# Altium PCB OUTDATED - motordriver-v6.3.PcbDoc (part 1 of 2)
Units mil, origin at the board's own origin, x right, y up, seen from the top; angles counter-clockwise.
Board outline 1181.1 x 2362.2 mil, 4 copper layers (TOP, GND, POWER, BOT), stack 23.756 mil thick; 171 components, 78 nets, 481 pads, 238 vias.
Unrouted connection lines stored in the file: 109.
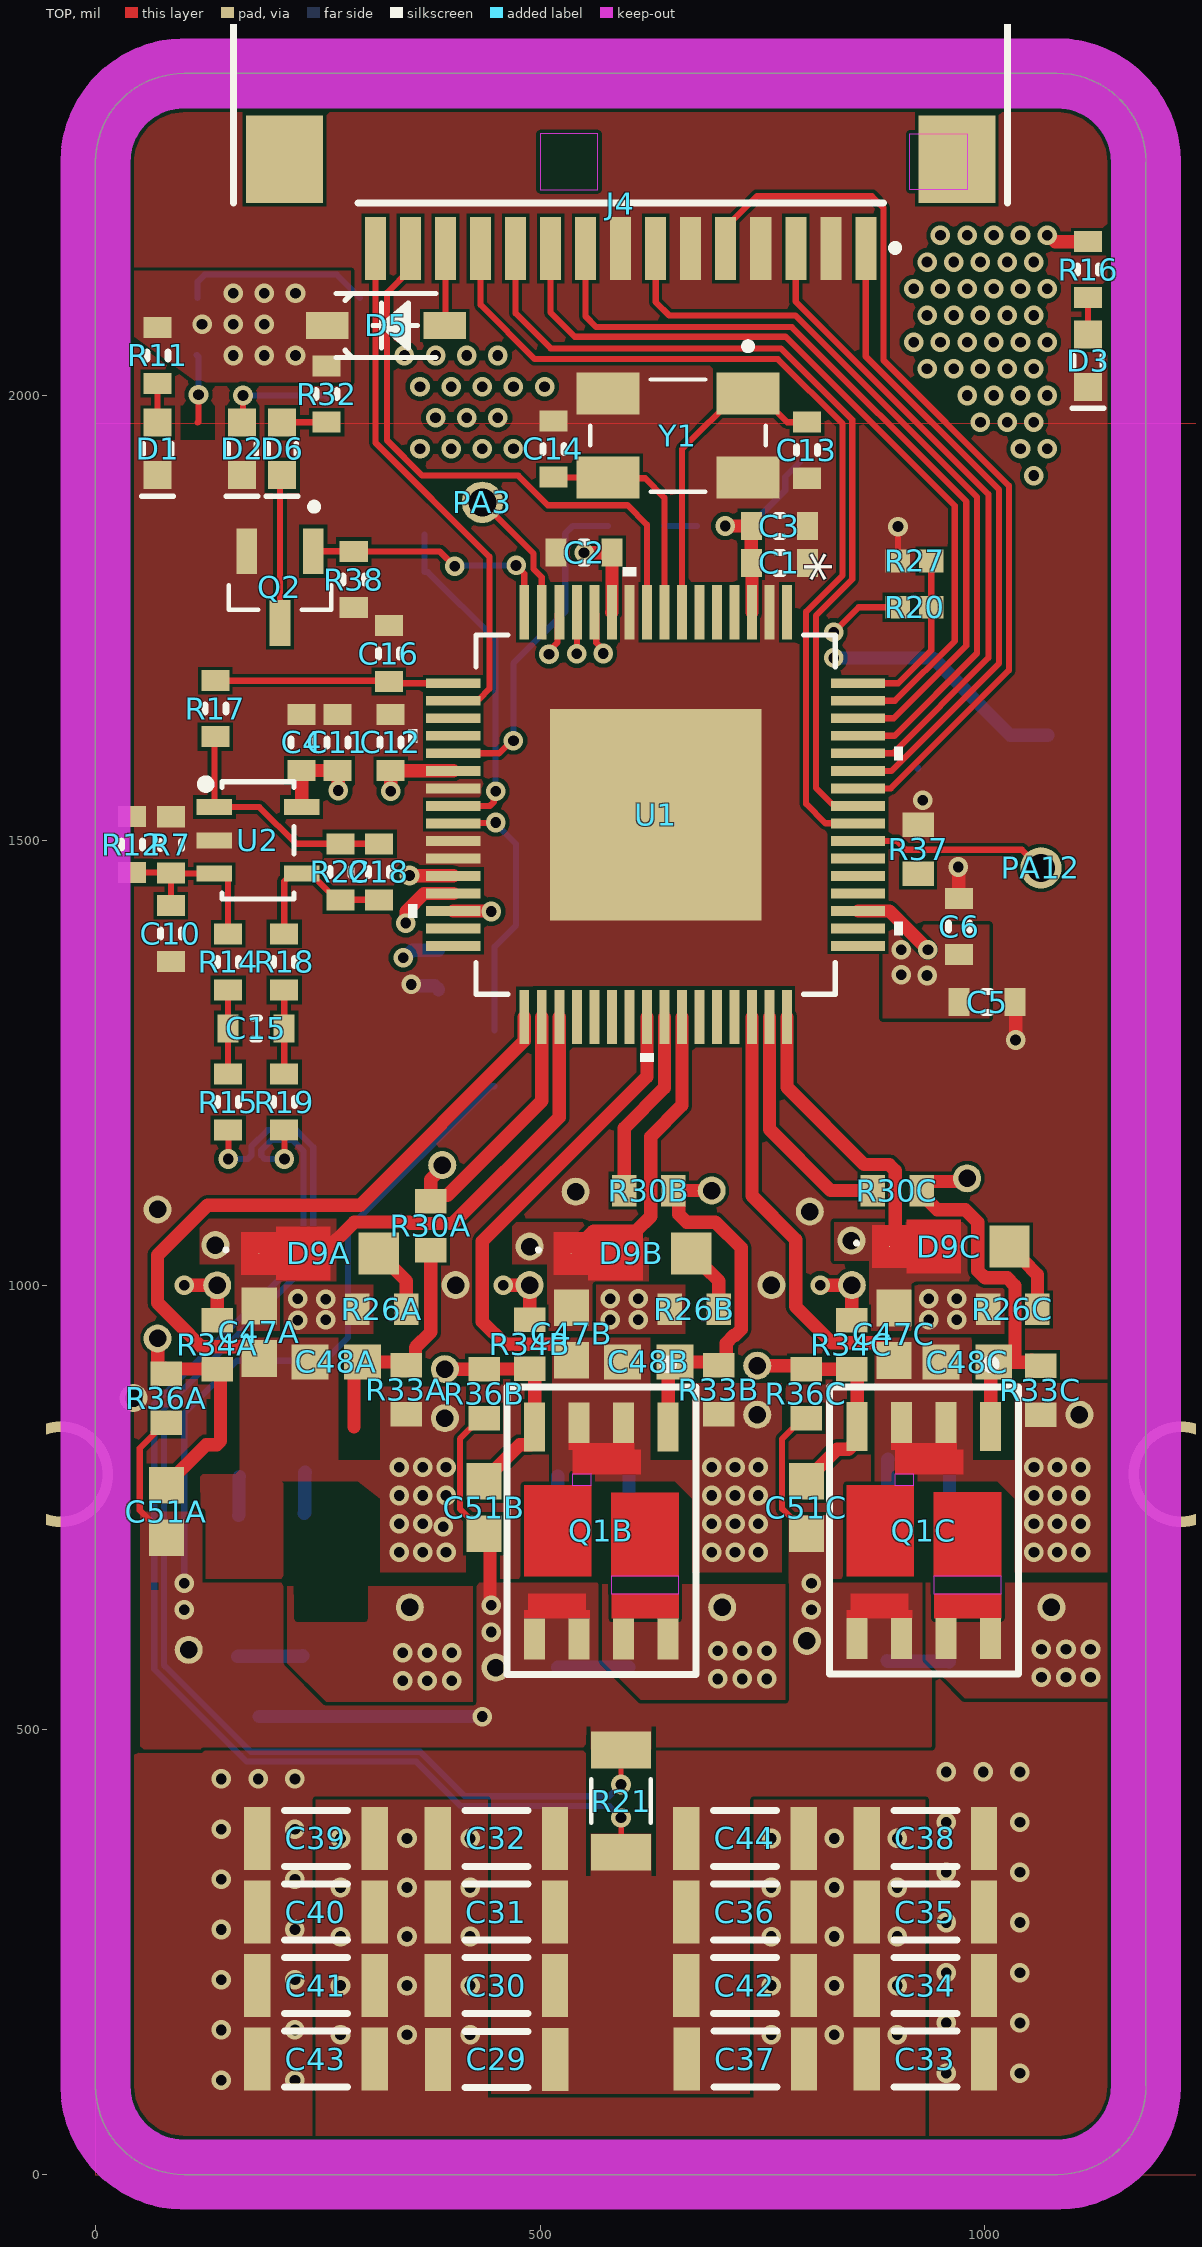
[diagram p0: TOP view]
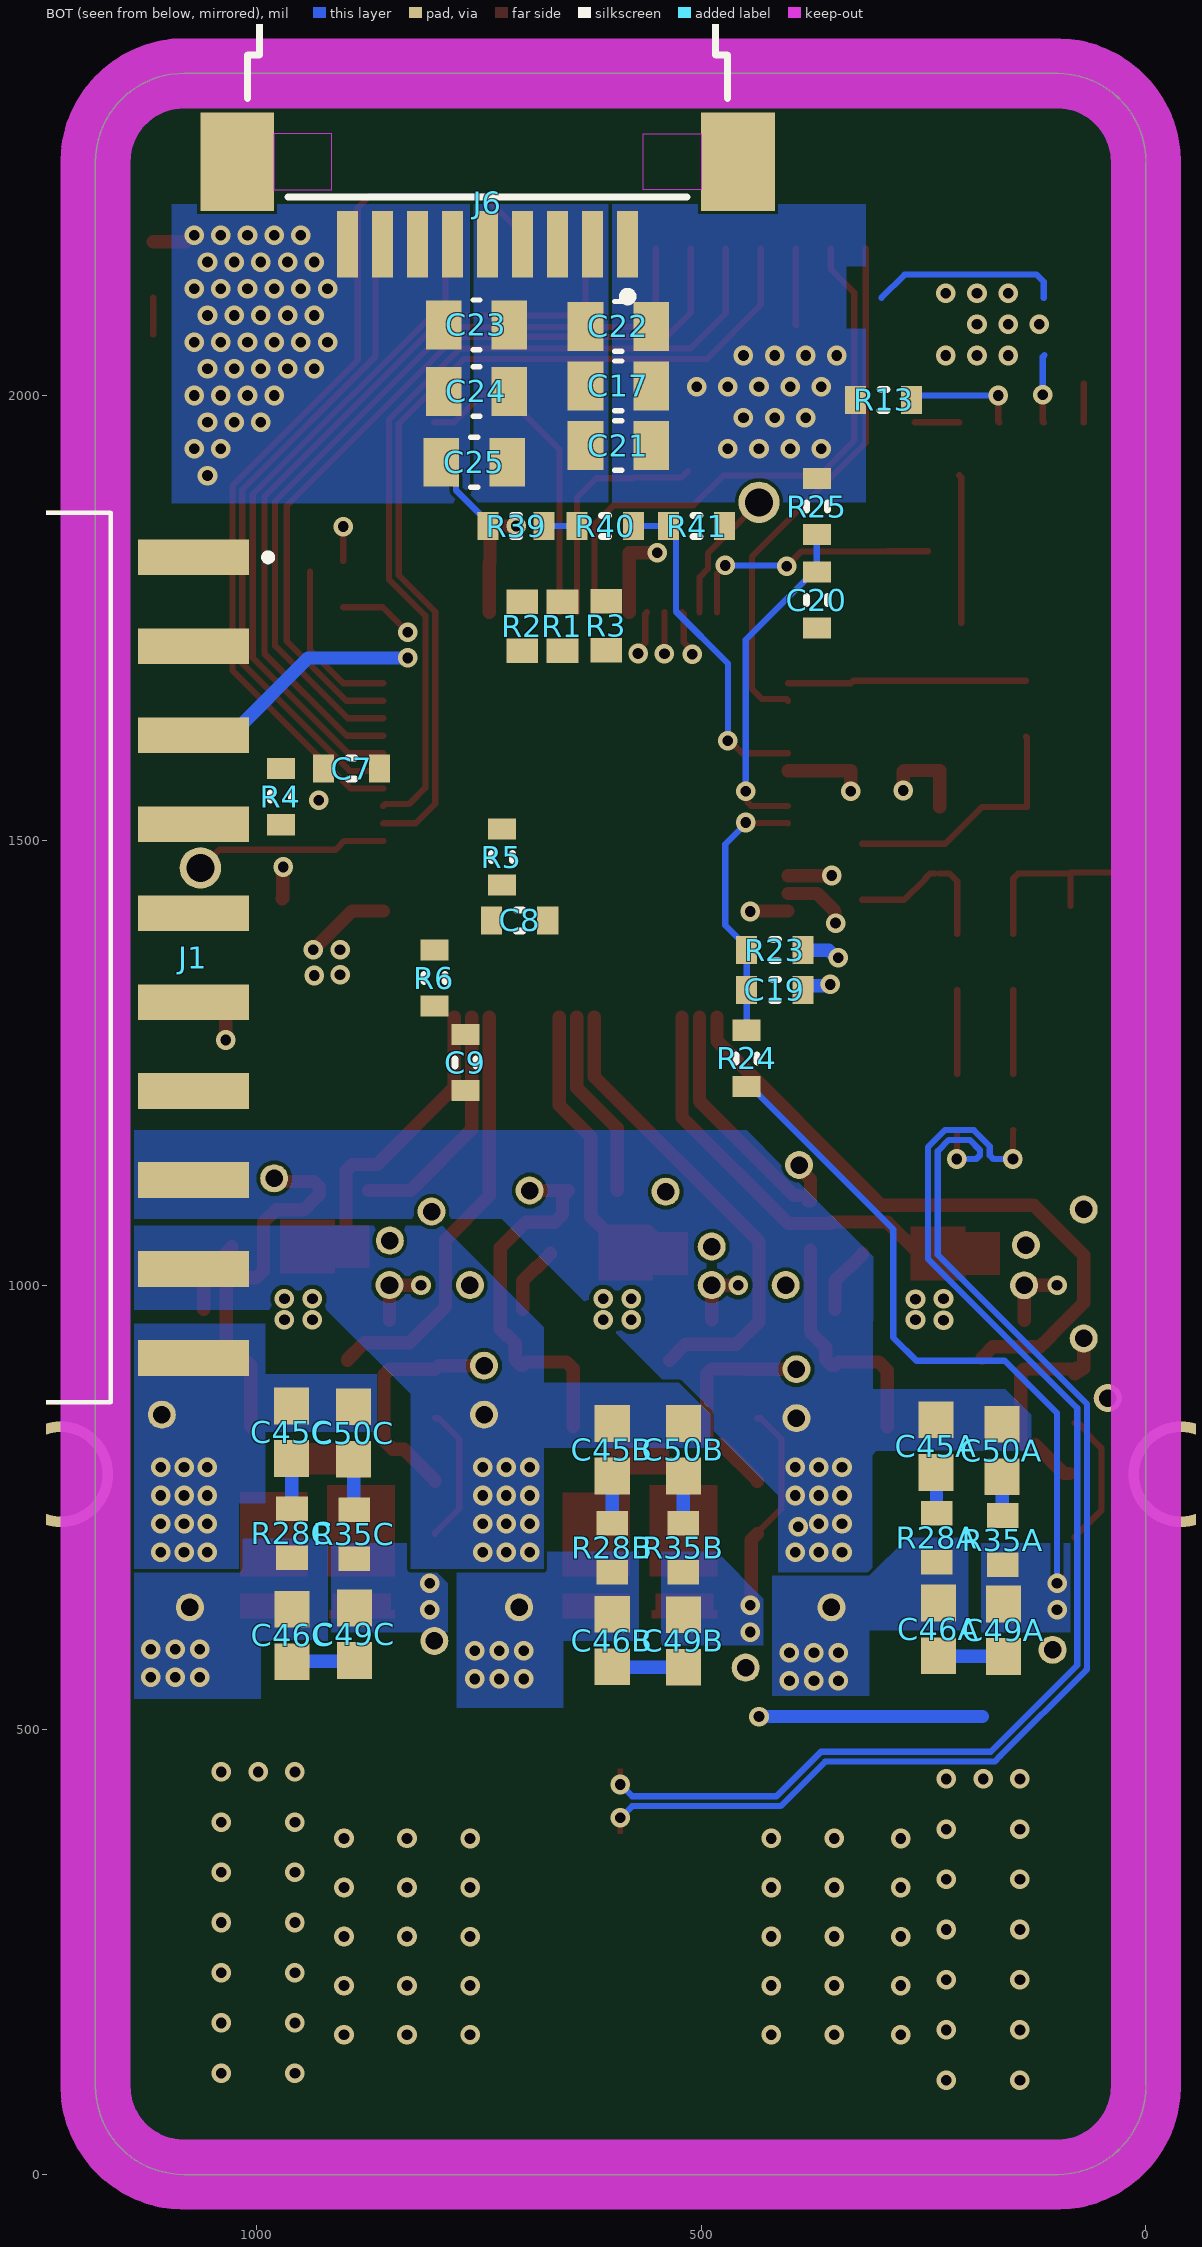
[diagram p1: BOT view, seen from below]
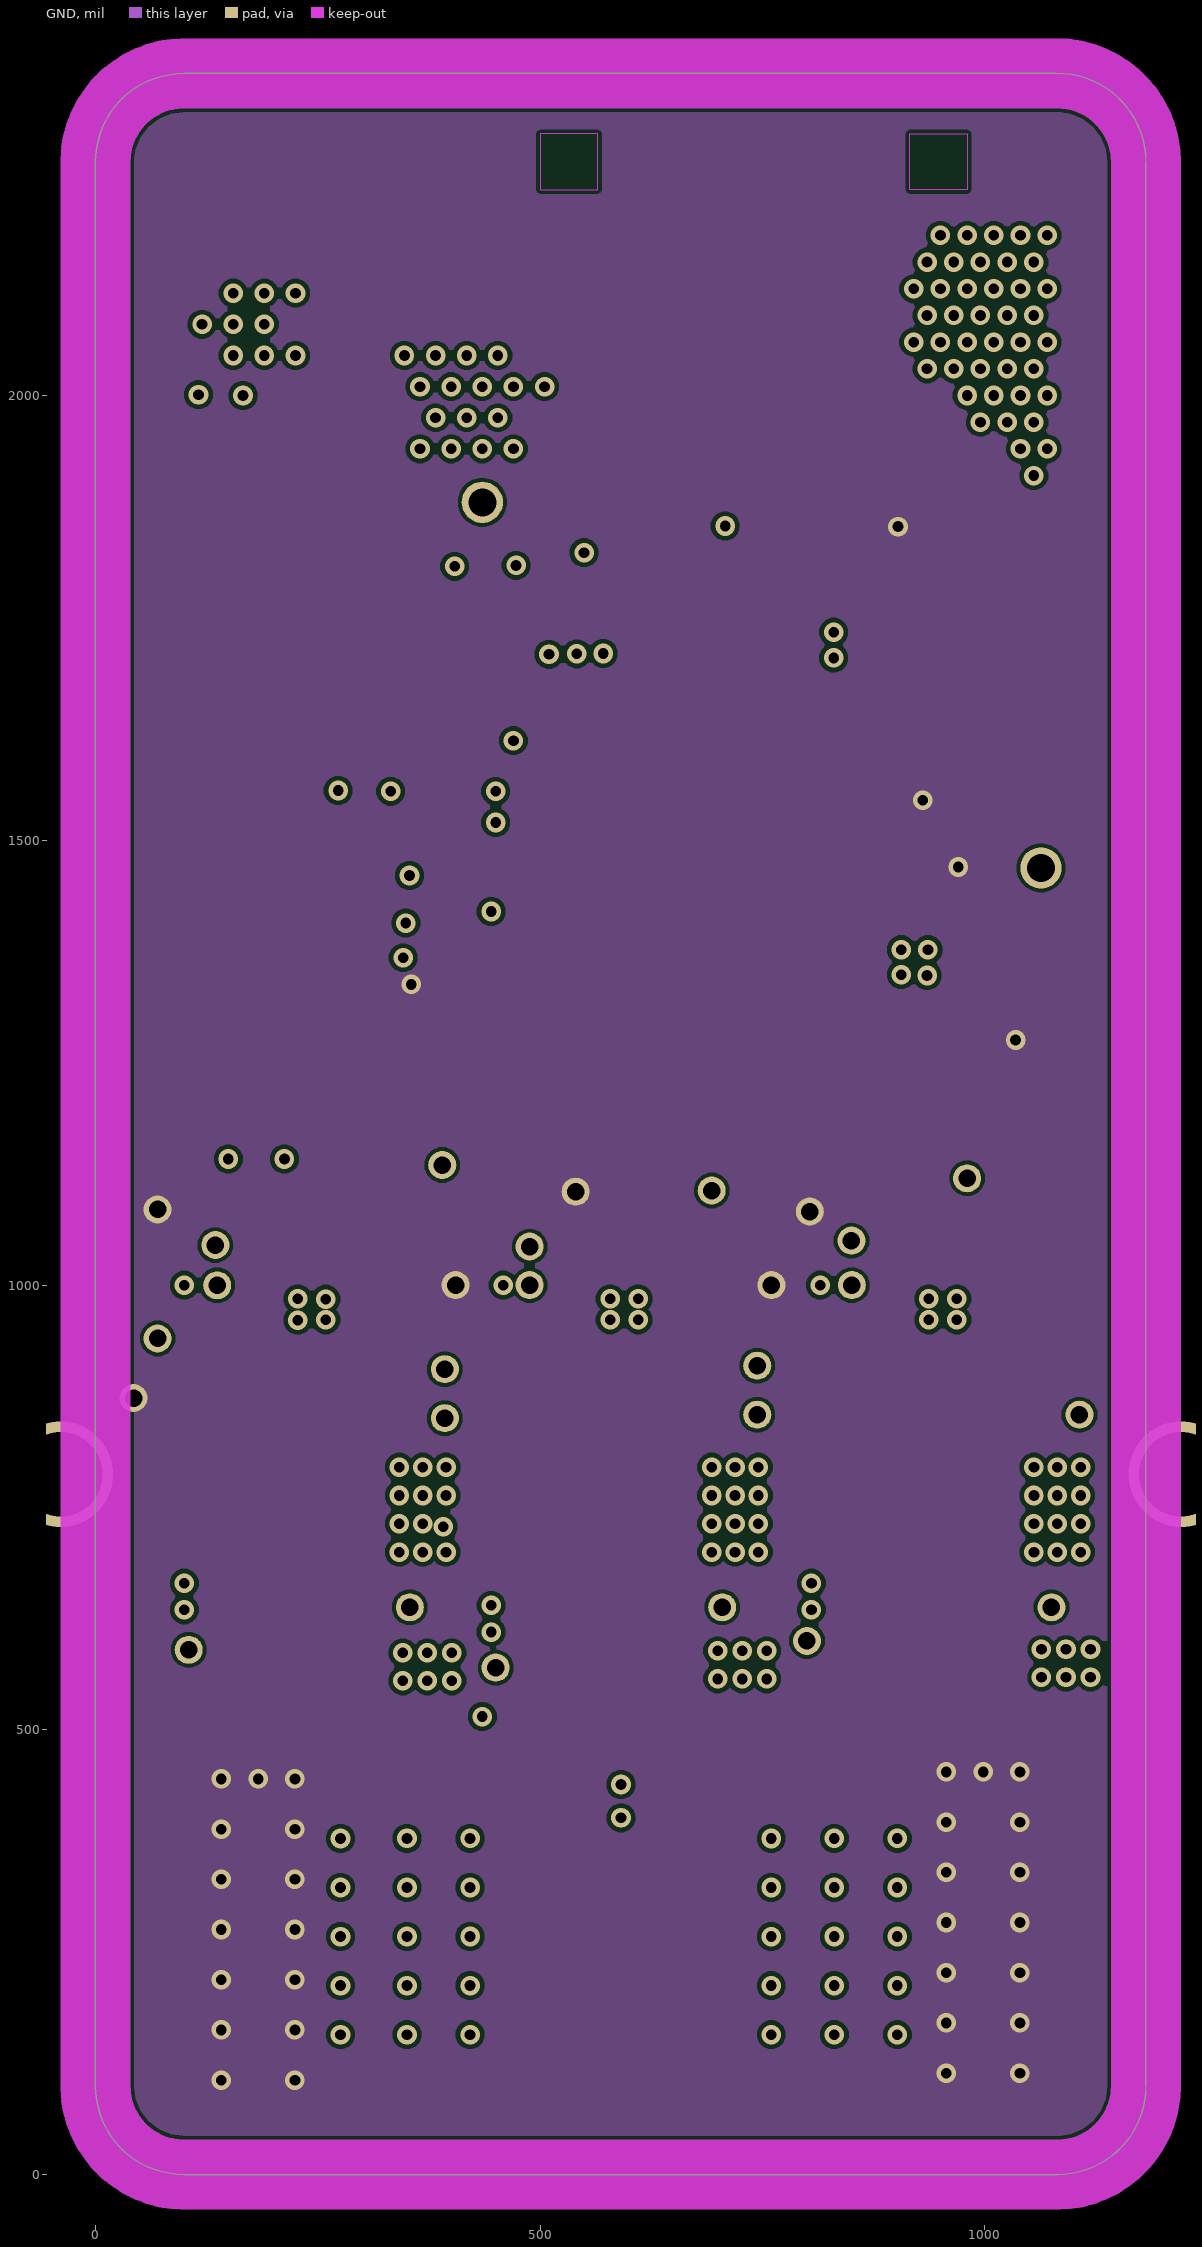
[diagram p2: GND]
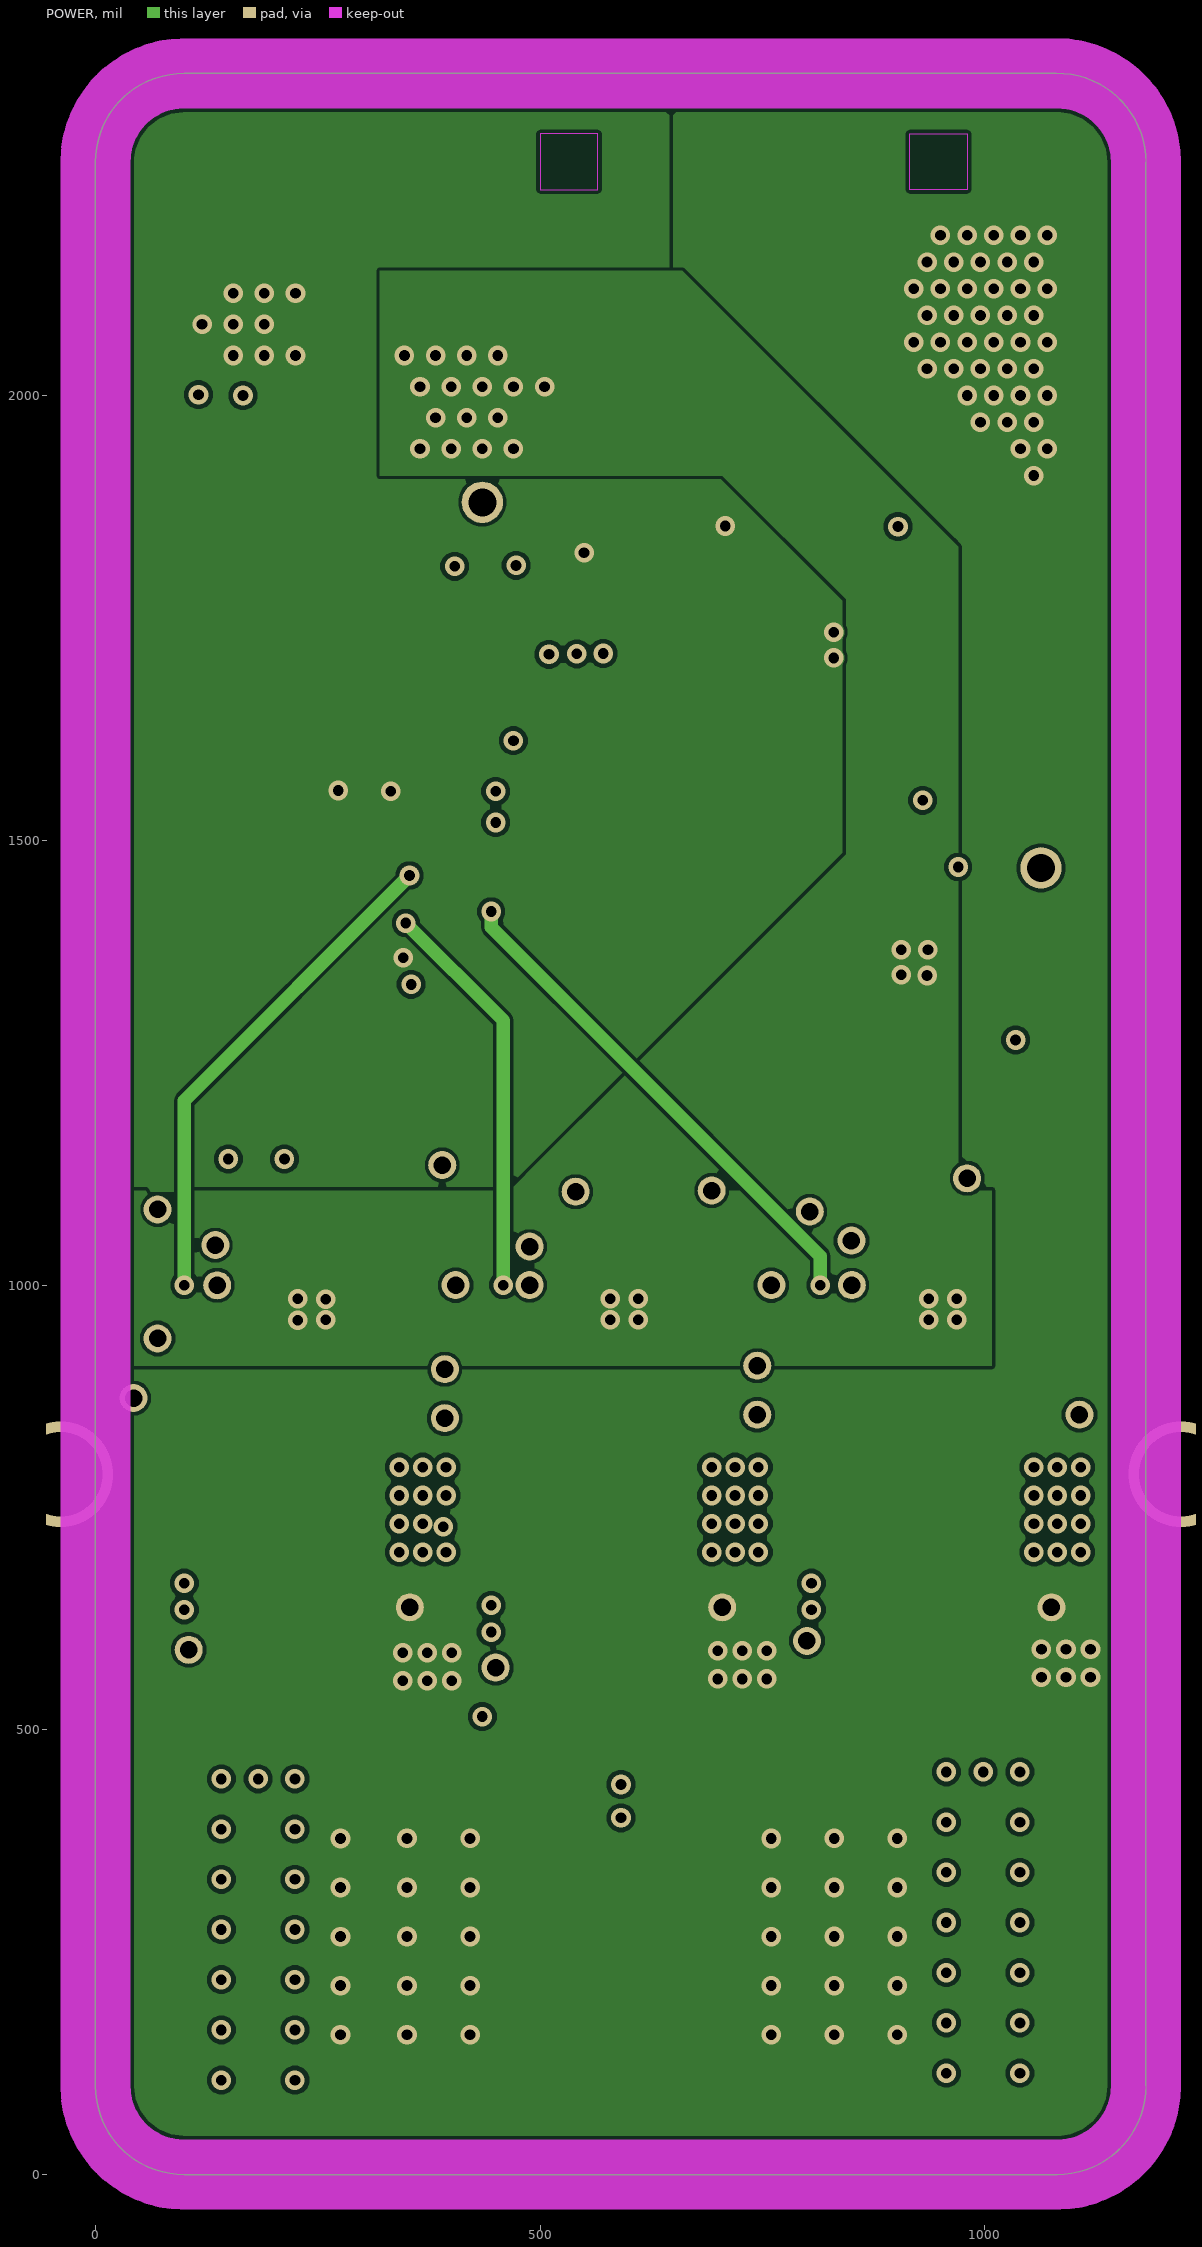
[diagram p3: POWER]

## Layer stack, top to bottom
Top Solder: solder mask 0.4, Solder Resist, Dk 3.5
TOP: signal copper 1.4
Dielectric 2: prepreg 2.8, PP-006, Dk 4.1
GND: signal copper 1.378
Dielectric 1: dielectric 12.6, FR-4, Dk 4.8
POWER: signal copper 1.378
Dielectric 3: prepreg 2.8, PP-006, Dk 4.1
BOT: signal copper 1.4
Bottom Solder: solder mask 0.4, Solder Resist, Dk 3.5

## Board outline
1181.1,2262.2 ccw(c1081.11,2262.21) 1080.33,2362.2 100,2362.2 ccw(c99.99,2262.21) 0,2262.2 0,100 ccw(c100,100) 100,0 1081.1,0 ccw(c1081.1,100) 1181.1,100 1181.1,2261.52 ccw(c1098.97,2262.11)

## Design rules (kind name [scope] priority, off if disabled: settings)
BoardOutlineClearance [All] p1: gap=7.87 ignorepadtopadclearanceinfootprint=FALSE
Clearance [All] p1: gap=4 ignorepadtopadclearanceinfootprint=FALSE except(5: Arc-Via Track-Via SMDPad-Via THPad-Via Via-Via Via-Fill Via-Poly Via-Region Via-Text; 9.84: Arc-Hole Track-Hole SMDPad-Hole THPad-Hole Via-Hole Fill-Hole Poly-Hole Region-Hole Text-Hole)
ComponentClearance [All] p1: gap=4 collisioncheckmode=3 verticalgap=4 showdistances=TRUE
DiffPairsRouting [All] p1: maxlimit=4 minlimit=4 mostfreqgap=4 toplayer_minwidth=4 toplayer_maxwidth=71497.94 toplayer_prefwidth=4 midlayer1_minwidth=4 midlayer1_maxwidth=71497.94 midlayer1_prefwidth=4 midlayer2_minwidth=4 midlayer2_maxwidth=71497.94 midlayer2_prefwidth=4 bottomlayer_minwidth=4 bottomlayer_maxwidth=71497.94 bottomlayer_prefwidth=4 maxuncoupledlength=500
Height [All] p1: minheight=0 maxheight=71497.94 prefheight=500
HoleSize [All] p1: absolutevalues=TRUE maxlimit=248.03 minlimit=7.87 maxpercent=80.000 minpercent=20.000
HoleToHoleClearance [All] p1: gap=9.84 allowstackedmicrovias=FALSE
MinimumAnnularRing [All] p1: minimumring=3
MinimumSolderMaskSliver [All] p1: minsoldermaskwidth=0
PlaneClearance [All] p1: clearance=4
PlaneConnect PlaneConnectPowerPads [InPadClass('PowerPads')] p1: planeconnectstyle=Direct reliefexpansion=20 reliefentries=4 reliefconductorwidth=10 reliefairgap=10
PlaneConnect [All] p2: pad.planeconnectstyle=Relief pad.reliefexpansion=11.81 pad.reliefentries=4 pad.reliefconductorwidth=4 pad.reliefairgap=4 via.planeconnectstyle=Direct via.reliefexpansion=11.81 via.reliefentries=4 via.reliefconductorwidth=5 via.reliefairgap=5
PolygonConnect PolygonConnectPowerPads [All vs (InPadClass('PowerPads'))] p1: connectstyle=Direct reliefconductorwidth=10 reliefentries=4 polygonreliefangle="90 Angle" airgapwidth=10
PolygonConnect [All] p2: connectstyle=Direct reliefconductorwidth=4 reliefentries=4 polygonreliefangle="90 Angle" airgapwidth=4
RoutingVias [All] p1: holewidth=7.87 width=17.72 viastyle="Through Hole" minholewidth=7.87 minwidth=17.72 maxholewidth=248.03 maxwidth=257.87 useviatemplates=TRUE viatemplateguid#1={32CECE7D-AA01-4692-BDA7-45C10FF4C971} viatemplatename#1=v56h30m0mx0
SilkToSilkClearance [All] p1: silktosilkclearance=0
SilkToSolderMaskClearance [IsPad] p1: minsilkscreentomaskgap=4 clearancetoexposedcopper=TRUE
SolderMaskExpansion [All] p1: expansion=2.95 istentingtop=FALSE
SupplyNets "Schematic Supply Nets_2" [InNet('Vdd')] p1: voltage=0.000
SupplyNets "Schematic Supply Nets_4" [InNet('GND')] p2: voltage=0.000
SupplyNets "Schematic Supply Nets_3" [InNet('VDD_UI')] p3: voltage=0.000
SupplyNets "Schematic Supply Nets_1" [InNet('VCC')] p4: voltage=0.000
SupplyNets "Schematic Supply Nets" [InNet('HV')] p5: voltage=0.000
Width [All] p1: maxlimit=71497.94 minlimit=4 preferedwidth=7
20 further rules are at their usual default settings.

## Classes and differential pairs
channel class inverter: Inverter1 Inverter2 Inverter3
component class STSPIN: C1 C2 C3 C4 C5 C6 C7 C8 C9 C10 C11 C12 C13 C14 C15 C16 C18 C19 C20 C29 C30 C31 C32 C33 C34 C35 C36 C37 C38 C39 C40 C41 C42 C43 C44 C_FB D1 D2 D3 D6 PA3 PA12 Q2 R1 R2 R3 R4 R5 R6 R7 R11 R12 R13 R14 R15 R16 R17 R18 R19 R20 R21 R22 R23 R24 R25 R27 R32 R37 R38 R39 R40 R41 S_N S_P TP1 TP2 TP3 TP4 TP5 TP6 TP7 TP8 TP9 TP11 TP12 U1 U2 Y1
component class "Power, Hall Sensor, Motor Connectors": C17 C21 C22 C23 C24 C25 D5 J1 J4 J6 J?
component class Inverter3: BOOTC C45C C46C C47C C48C C49C C50C C51C D9C HGC HVGC LGC LVGC OUT1C Q1C R26C R28C R30C R33C R34C R35C R36C SENSE1C TP10C
component class Inverter2: BOOTB C45B C46B C47B C48B C49B C50B C51B D9B HGB HVGB LGB LVGB OUT1B Q1B R26B R28B R30B R33B R34B R35B R36B SENSE1B TP10B
component class Inverter1: BOOTA C45A C46A C47A C48A C49A C50A C51A D9A HGA HVGA LGA LVGA OUT1A Q1A R26A R28A R30A R33A R34A R35A R36A SENSE1A TP10A
differential pair SENSE: +SENSE_P -SENSE_N
differential pair SENSE_F: +SENSE_F_P -SENSE_F_N

## Components (designator, comment, footprint, x,y, rotation, side; value= is the part's Value field where it differs from the comment)
BOOTA "RCT-0C" RCT-0C-Footprint-1 3488.19,1913.39 r90 top (schematic designator BOOT)
BOOTB "RCT-0C" RCT-0C-Footprint-1 3488.19,2228.35 r90 top (schematic designator BOOT)
BOOTC "RCT-0C" RCT-0C-Footprint-1 3488.19,2503.94 r90 top (schematic designator BOOT)
C1 "100nF" 0603 769,1812 r180 top
C2 "100nF" 0603 549.41,1823.36 r0 top
C3 "100nF" 0603 768.91,1853.31 r180 top
C4 "100nF" 0603 232,1610 r270 top
C5 "100nF" 0603 1002.5,1318.11 r180 top
C6 "2200pF" 0603 971,1403 r270 top
C7 "50pF 50V" 0603 892.94,1580.49 r0 bottom value=10nF
C8 "50pF 50V" 0603 704,1410 r0 bottom value=10nF
C9 "50pF 50V" 0603 765,1250 r90 bottom value=10nF
C10 "22pF" 0603 85,1395 r270 top
C11 "10uF" 0603 272,1610 r270 top
C12 "0.10uF" 0603 332,1610 r270 top
C13 "10pF" 0603 800,1938.5 r90 top locked
C14 "10pF" 0603 515,1940 r270 top locked
C15 "330pF" 0603 180.79,1288.48 r180 top
C16 "220pF" 0603 330,1710 r270 top
C17 "CAP 10uF 50V" 0805 593.07,2010.75 r180 bottom value=10µF
C18 "22pF" 0603 318.9,1464.57 r270 top
C19 "1nF 50V" 0603 417.32,1331.79 r0 bottom value=10nF
C20 "0.047uF" 0603 370,1770 r90 bottom
C21 "CAP 10uF 50V" 0805 593.07,1943.82 r180 bottom value=10µF
C22 "CAP 10uF 50V" 0805 593.07,2077.68 r180 bottom value=10µF
C23 "10uF" 0805 752.62,2079.33 r0 bottom
C24 "10uF" 0805 752.62,2004.53 r0 bottom
C25 "10uF" 0805 755,1925 r0 bottom
C29 "50V" "1206 IPC Class B" 451.18,129.53 r180 top value=10µF
C30 "50V" "1206 IPC Class B" 450.79,212.61 r180 top value=10µF
C31 "50V" "1206 IPC Class B" 450.79,295.28 r180 top value=10µF
C32 "50V" "1206 IPC Class B" 450.79,377.95 r180 top value=10µF
C33 "50V" "1206 IPC Class B" 933.07,129.92 r180 top value=10µF
C34 "50V" "1206 IPC Class B" 933.07,212.6 r180 top value=10µF
C35 "50V" "1206 IPC Class B" 933.07,295.28 r180 top value=10µF
C36 "50V" "1206 IPC Class B" 730.32,295.28 r0 top value=10µF
C37 "50V" "1206 IPC Class B" 730.71,129.92 r0 top value=10µF
C38 "50V" "1206 IPC Class B" 933.07,377.95 r180 top value=10µF
C39 "50V" "1206 IPC Class B" 248.03,377.96 r0 top value=10µF
C40 "50V" "1206 IPC Class B" 248.03,295.28 r0 top value=10µF
C41 "50V" "1206 IPC Class B" 248.03,212.61 r0 top value=10µF
C42 "50V" "1206 IPC Class B" 730.32,212.6 r0 top value=10µF
C43 "50V" "1206 IPC Class B" 248.03,129.92 r0 top value=10µF
C44 "50V" "1206 IPC Class B" 730.32,377.95 r0 top value=10µF
C45A "Ceramic Capacitor 0603 Temp" "0603 IPC Class B"#1 236,819 r270 bottom (schematic designator C45)
C45B "Ceramic Capacitor 0603 Temp" "0603 IPC Class B"#1 600,815 r270 bottom (schematic designator C45)
C45C "Ceramic Capacitor 0603 Temp" "0603 IPC Class B"#1 960.51,834.61 r270 bottom (schematic designator C45)
C46A "Ceramic Capacitor 0.22uF +/-10% 50V 0603" "0603 IPC Class B"#1 233,613 r90 bottom value=220nF (schematic designator C46)
C46B "Ceramic Capacitor 0.22uF +/-10% 50V 0603" "0603 IPC Class B"#1 600,600.47 r90 bottom value=220nF (schematic designator C46)
C46C "Ceramic Capacitor 0.22uF +/-10% 50V 0603" "0603 IPC Class B"#1 960,606.14 r90 bottom value=220nF (schematic designator C46)
C47A "Ceramic Capacitor 0.22uF +/-10% 50V 0603" "0603 IPC Class B"#1 184.29,947.1 r90 top value=220nF (schematic designator C47)
C47B "Ceramic Capacitor 0.22uF +/-10% 50V 0603" "0603 IPC Class B"#1 535.43,945.13 r90 top value=220nF (schematic designator C47)
C47C "Ceramic Capacitor 0.22uF +/-10% 50V 0603" "0603 IPC Class B"#1 897.64,944.88 r90 top value=220nF (schematic designator C47)
C48A "Ceramic Capacitor 0603 Temp" "0603 IPC Class B"#1 270.91,913.64 r0 top (schematic designator C48)
C48B "Ceramic Capacitor 0603 Temp" "0603 IPC Class B"#1 622.05,913.64 r0 top (schematic designator C48)
C48C "Ceramic Capacitor 0603 Temp" "0603 IPC Class B"#1 980.32,913.39 r0 top (schematic designator C48)
C49A "Ceramic Capacitor 0.22uF +/-10% 50V 0603" "0603 IPC Class B"#1 160,612 r270 bottom value=220nF (schematic designator C49)
C49B "Ceramic Capacitor 0.22uF +/-10% 50V 0603" "0603 IPC Class B"#1 520,600 r270 bottom value=220nF (schematic designator C49)
C49C "Ceramic Capacitor 0.22uF +/-10% 50V 0603" "0603 IPC Class B"#1 890,607.56 r270 bottom value=220nF (schematic designator C49)
C50A "Ceramic Capacitor 0603 Temp" "0603 IPC Class B"#1 162,814 r90 bottom (schematic designator C50)
C50B "Ceramic Capacitor 0603 Temp" "0603 IPC Class B"#1 520,815 r90 bottom (schematic designator C50)
C50C "Ceramic Capacitor 0603 Temp" "0603 IPC Class B"#1 891.02,833.66 r90 bottom (schematic designator C50)
C51A "Ceramic Capacitor 0603 Temp" "0603 IPC Class B"#1 80,745.47 r90 top (schematic designator C51)
C51B "Ceramic Capacitor 0603 Temp" "0603 IPC Class B"#1 437.01,750 r90 top (schematic designator C51)
C51C "Ceramic Capacitor 0603 Temp" "0603 IPC Class B"#1 799.21,750 r90 top (schematic designator C51)
C_FB "RCT-0C" RCT-0C-Footprint-1 4354.33,1637.8 r90 top
D1 "0603 2V" "0603 - LED" 70,1940 r270 top
D2 "0603 2V" "0603 - LED" 165,1940 r270 top
D3 "0603 3.2V" "0603 - LED" 1116,2039 r270 top
D5 "SM5817PL-TP" SOD-123 326.77,2078.74 r0 top
D6 "0603 2V" "0603 - LED" 210,1940 r270 top
D9A "PMEG4010EXEX" PMEG4010EXEX 251.22,1035.68 r0 top (schematic designator D9)
D9B "PMEG4010EXEX" PMEG4010EXEX 602.36,1035.68 r0 top (schematic designator D9)
D9C "PMEG4010EXEX" PMEG4010EXEX 960.12,1043.31 r0 top (schematic designator D9)
HGA "RCT-0C" RCT-0C-Footprint-1 3212.6,1913.39 r0 top (schematic designator HG)
HGB "RCT-0C" RCT-0C-Footprint-1 3212.6,2188.98 r0 top (schematic designator HG)
HGC "RCT-0C" RCT-0C-Footprint-1 3212.6,2503.94 r0 top (schematic designator HG)
HVGA "RCT-0C" RCT-0C-Footprint-1 2937.01,1913.39 r90 top (schematic designator HVG)
HVGB "RCT-0C" RCT-0C-Footprint-1 2937.01,2228.35 r90 top (schematic designator HVG)
HVGC "RCT-0C" RCT-0C-Footprint-1 2937.01,2503.94 r90 top (schematic designator HVG)
J1 "M20-8891045" M20-8891045-Footprint-1 1268.19,1748.11 r270 bottom locked
J4 "ZF1-15-01-X-WT-XX" SAMTEC_ZF1-15-01-X-WT-XX 590.55,2165.35 r180 top locked
J6 "52207-0960" MOLX-52207-0960 740.16,2216.54 r0 bottom
J? "686124188622" 686124188622 1905.51,812.99 r90 top
LGA "RCT-0C" RCT-0C-Footprint-1 1559.06,1913.39 r0 top (schematic designator LG)
LGB "RCT-0C" RCT-0C-Footprint-1 1559.06,2188.98 r0 top (schematic designator LG)
LGC "RCT-0C" RCT-0C-Footprint-1 1559.06,2503.94 r0 top (schematic designator LG)
LVGA "RCT-0C" RCT-0C-Footprint-1 1283.47,1913.39 r90 top (schematic designator LVG)
LVGB "RCT-0C" RCT-0C-Footprint-1 1283.47,2228.35 r90 top (schematic designator LVG)
LVGC "RCT-0C" RCT-0C-Footprint-1 1283.47,2503.94 r90 top (schematic designator LVG)
OUT1A "RCT-0C" RCT-0C-Footprint-1 2267.72,1913.39 r90 top (schematic designator OUT1)
OUT1B "RCT-0C" RCT-0C-Footprint-1 2267.72,2228.35 r90 top (schematic designator OUT1)
OUT1C "RCT-0C" RCT-0C-Footprint-1 2267.72,2503.94 r90 top (schematic designator OUT1)
PA3 "Test Point (Via)" TP 435,1880 r0 top
PA12 "Test Point (Via)" TP 1063,1469 r90 top
Q1A "IAUC45N04S6N070H" IFX-PG-TDSON-8-57-V#1 -275.59,511.81 r90 top (schematic designator Q1)
Q1B "IAUC45N04S6N070H" IFX-PG-TDSON-8-57-V#2 568.9,723.82 r270 top (schematic designator Q1)
Q1C "IAUC45N04S6N070H" IFX-PG-TDSON-8-57-V#2 931.5,724.02 r270 top (schematic designator Q1)
Q2 "TN2130K1-G" SOT95P237X112-3N 207.6,1784.65 r270 top
R1 "Resistor 0603 Temp" "0603 IPC Class B"#2 655.93,1740.68 r90 bottom
R2 "Resistor 0603 Temp" "0603 IPC Class B"#2 700.93,1740.68 r90 bottom
R3 "Resistor 0603 Temp" "0603 IPC Class B"#2 607,1741 r90 bottom
R4 "1.8k" 0603 972.5,1549 r90 bottom
R5 "1.8k" 0603 724,1481 r270 bottom
R6 "1.8k" 0603 800,1345 r270 bottom
R7 "5.83k" 0603 85,1495 r270 top value=8.45k
R11 "110" 0603 70,2045 r90 top
R12 "5.83k" 0603 41.14,1495.27 r270 top value=8.45k
R13 "845R" 0603 295,1995 r0 bottom value=8.45k
R14 "100R" 0603 149.29,1363.28 r90 top value=8.45k
R15 "100R" 0603 149.29,1205.8 r90 top value=8.45k
R16 "1.87K" 0603 1116,2141.5 r90 top value=8.45k
R17 "100R" 0603 135,1648 r90 top value=8.45k
R18 "100R" 0603 212.28,1363.28 r90 top value=8.45k
R19 "100R" 0603 212.28,1205.8 r90 top value=8.45k
R20 "Resistor 0R 0402 63 mW" RESC1005X40X25ML05T10 921,1762 r180 top value=0
R21 "RES 15m 1W" "1206 - Current Sense" 590.94,419.88 r270 top
R22 "5.83k" 0603 275.59,1464.57 r90 top value=8.45k
R23 "17.2k" 0603 417.32,1376.5 r0 bottom value=8.45k
R24 "2k" 0603 448.82,1255 r90 bottom
R25 "47k" 0603 370,1875 r90 bottom
R26A "Resistor 10R +/-1% 250mW 0603" "0603 IPC Class B"#2 322.09,972.69 r180 top value=10 (schematic designator R26)
R26B "Resistor 10R +/-1% 250mW 0603" "0603 IPC Class B"#2 673.23,972.69 r180 top value=10 (schematic designator R26)
R26C "Resistor 10R +/-1% 250mW 0603" "0603 IPC Class B"#2 1031.5,972.69 r180 top value=10 (schematic designator R26)
R27 "Resistor 0R 0402 63 mW" RESC1005X40X25ML05T10 921,1814 r180 top value=0
R28A "Resistor 0603 Temp" "0603 IPC Class B"#2 235,716 r270 bottom (schematic designator R28)
R28B "Resistor 0603 Temp" "0603 IPC Class B"#2 600,705 r270 bottom (schematic designator R28)
R28C "Resistor 0603 Temp" "0603 IPC Class B"#2 960,721.14 r270 bottom (schematic designator R28)
R30A "Resistor 10R +/-1% 250mW 0603" "0603 IPC Class B"#2 377.2,1066.93 r270 top value=10 (schematic designator R30)
R30B "Resistor 10R +/-1% 250mW 0603" "0603 IPC Class B"#2 622.05,1106.3 r0 top value=10 (schematic designator R30)
R30C "Resistor 10R +/-1% 250mW 0603" "0603 IPC Class B"#2 901.57,1106.3 r0 top value=10 (schematic designator R30)
R32 "110" 0603 260,2001.5 r90 top
R33A "Resistor 100k +/-1% 1/10W 0603" "0603 IPC Class B"#2 349.65,882.14 r90 top value=100k (schematic designator R33)
R33B "Resistor 100k +/-1% 1/10W 0603" "0603 IPC Class B"#2 700.79,882.14 r90 top value=100k (schematic designator R33)
R33C "Resistor 100k +/-1% 1/10W 0603" "0603 IPC Class B"#2 1062.99,881.89 r90 top value=100k (schematic designator R33)
R34A "Resistor 10R +/-1% 250mW 0603" "0603 IPC Class B"#2 137.05,933.07 r270 top value=10 (schematic designator R34)
R34B "Resistor 10R +/-1% 250mW 0603" "0603 IPC Class B"#2 488.19,933.32 r270 top value=10 (schematic designator R34)
R34C "Resistor 10R +/-1% 250mW 0603" "0603 IPC Class B"#2 850.39,933.07 r270 top value=10 (schematic designator R34)
R35A "Resistor 0603 Temp" "0603 IPC Class B"#2 161,713.44 r90 bottom (schematic designator R35)
R35B "Resistor 0603 Temp" "0603 IPC Class B"#2 520,705 r90 bottom (schematic designator R35)
R35C "Resistor 0603 Temp" "0603 IPC Class B"#2 890,720 r90 bottom (schematic designator R35)
R36A "Resistor 100k +/-1% 1/10W 0603" "0603 IPC Class B"#2 80,872.56 r90 top value=100k (schematic designator R36)
R36B "Resistor 100k +/-1% 1/10W 0603" "0603 IPC Class B"#2 437.01,877.95 r90 top value=100k (schematic designator R36)
R36C "Resistor 100k +/-1% 1/10W 0603" "0603 IPC Class B"#2 799.21,877.95 r90 top value=100k (schematic designator R36)
R37 "Resistor 0R 0.1W 0603" "0603 IPC Class B"#2 925,1490 r90 top value=0
R38 "10k" 0603 290.52,1793.14 r90 top
R39 "470k" 0603 708,1853.31 r180 bottom
R40 "470k" 0603 607.88,1853.31 r180 bottom
R41 "68k" 0603 505.14,1853.31 r0 bottom
S_N "RCT-0C" RCT-0C-Footprint-1 3881.89,1637.8 r0 top
S_P "RCT-0C" RCT-0C-Footprint-1 4078.74,1637.8 r0 top
SENSE1A "RCT-0C" RCT-0C-Footprint-1 1795.28,1913.39 r90 top (schematic designator SENSE1)
SENSE1B "RCT-0C" RCT-0C-Footprint-1 1795.28,2228.35 r90 top (schematic designator SENSE1)
SENSE1C "RCT-0C" RCT-0C-Footprint-1 1795.28,2503.94 r90 top (schematic designator SENSE1)
TP1 "RCT-0C" RCT-0C-Footprint-1 1283.47,1637.8 r0 top
TP2 "RCT-0C" RCT-0C-Footprint-1 1480.32,1637.8 r0 top
TP3 "RCT-0C" RCT-0C-Footprint-1 1716.54,1637.8 r0 top
TP4 "RCT-0C" RCT-0C-Footprint-1 1952.76,1637.8 r0 top
TP5 "RCT-0C" RCT-0C-Footprint-1 2188.98,1637.8 r0 top
TP6 "RCT-0C" RCT-0C-Footprint-1 2425.2,1637.8 r0 top
TP7 "RCT-0C" RCT-0C-Footprint-1 2622.05,1637.8 r0 top
TP8 "RCT-0C" RCT-0C-Footprint-1 2858.27,1637.8 r0 top
TP9 "RCT-0C" RCT-0C-Footprint-1 3094.49,1637.8 r0 top
TP10A "RCT-0C" RCT-0C-Footprint-1 2622.05,1913.39 r90 top (schematic designator TP10)
TP10B "RCT-0C" RCT-0C-Footprint-1 2622.05,2228.35 r90 top (schematic designator TP10)
TP10C "RCT-0C" RCT-0C-Footprint-1 2622.05,2503.94 r90 top (schematic designator TP10)
TP11 "RCT-0C" RCT-0C-Footprint-1 3606.3,1637.8 r90 top
TP12 "RCT-0C" RCT-0C-Footprint-1 3330.71,1637.8 r90 top
U1 "STSPIN32F0251" TQFP64_10X10_STM-M 629.92,1528.86 r270 top locked
U2 "OPA356" SOT-23-5_MC_MCH-L 133.86,1537.4 r0 top
Y1 "ABM3B-8.000MHZ-10-1-U-T" XTAL_ABM3B-8.000MHZ-10-1-U-T 655,1955 r270 top locked

## Footprints (in the part's own frame and the unit in brackets; to place one, negate y for a bottom-side part, rotate by r counter-clockwise, add the part's x,y. Pads: shape width x height; smd on the part's side, far side on the other; paste and mask are expansions set on the pad)
0603 [mm] "Chip Resistor, 2-Leads, Body 1.60x0.80mm, IPC High Density"
  rect 0.6x0.8 smd mask+0.1: 1(-0.8,0) 2(0.8,0)
  silkscreen extent -0.1,-0.3 0.1,0.3, body extent -0.8,-0.4 0.8,0.4, height 0.6
"0603 - LED" [mm]
  rect 0.8x0.8 smd: 1(-0.75,0) 2(0.75,0)
  silkscreen extent -0.15,-0.45 1.35,0.45, body extent -0.8,-0.4 0.8,0.4, height 0.65
"0603 IPC Class B"#1 [mm] "Chip Capacitor, 2-Leads, IPC Medium Density"
  rect 1.05x1 smd: 1(-0.75,0) 2(0.75,0)
  body extent -0.87,-0.48 0.87,0.48, height 0.94
"0603 IPC Class B"#2 [mm]
  rect 0.7x0.9 smd: 1(-0.7,0) 2(0.7,0)
  body extent -0.85,-0.45 0.85,0.45, height 0.55
0805 [mil]
  rect 40x55 smd: 1(-37,0) 2(37,0)
  silkscreen extent -4,-28 4,28, body extent -47,-28 47,28, height 24
"1206 - Current Sense" [mm]
  rect 1.05x1.72 smd: 1(-1.46,0) 2(1.46,0)
  rect 0.152x0.152 smd mask+0.102: S1(-0.476,0) S2(0.476,0)
  TOP region: 0.936,0.079 0.553,0.079 0.553,-0.074 0.936,-0.074
  TOP region: -0.936,-0.075 -0.553,-0.075 -0.553,0.078 -0.936,0.078
  silkscreen extent -0.62,-0.85 0.62,0.85, body extent -1.6,-0.8 1.6,0.8, height 1.61
"1206 IPC Class B" [mm] "Chip Capacitor, 2-Leads, IPC Medium Density"
  rect 0.75x1.8 smd: 1(-1.675,0) 2(1.675,0)
  silkscreen extent -0.9,-0.8 0.9,0.8, body extent -1.7,-0.9 1.7,0.9, height 1.8
686124188622 [mm] "LIF Connectors, Horizontal, Top Contact, pitch 1mm, 24p"
  rect 0.6x1.9 smd: 1(-11.5,3.75) 2(-10.5,3.75) 3(-9.5,3.75) 4(-8.5,3.75) 5(-7.5,3.75) 6(-6.5,3.75) 7(-5.5,3.75) 8(-4.5,3.75) 9(-3.5,3.75) 10(-2.5,3.75) 11(-1.5,3.75) 12(-0.5,3.75) 13(0.5,3.75) 14(1.5,3.75) 15(2.5,3.75) 16(3.5,3.75) 17(4.5,3.75) 18(5.5,3.75) 19(6.5,3.75) 20(7.5,3.75) 21(8.5,3.75) 22(9.5,3.75) 23(10.5,3.75) 24(11.5,3.75)
  rect 2.1x2.8 smd: M1(-14.65,1.4) M2(14.65,1.4)
  silkscreen extent -14,-2.5 14,3.87, body extent -15.15,-2.4 15.15,4.4, height 3.1
IFX-PG-TDSON-8-57-V#1 [mm] "TDSON 8, 1.27mm pitch; 8 pin, 5.48 mm L X 5.15 mm W X 1 mm H body"
  rect 1.4x0.6 smd paste-0.3 mask+0: 1(-2.97,1.905) 4(-2.97,-1.905)
  rect 1.17x0.6 smd paste-0.3 mask+0: 2(-3.085,0.635) 3(-3.085,-0.635) 5(3.085,-1.905) 6(3.085,-0.635) 7(3.085,0.635) 8(3.085,1.905)
  round 0.025 smd: 2,3(-2.055,0.095) 2,3(-1.46,-0.555) 2,3(0,-1.245) 5,6(2.15,-1.27) 7,8(0.105,1.245) 7,8(1.55,1.245) 7,8(2.15,1.252)
  TOP region: 2.5,-2.205 2.27,-2.205 2.27,-2.095 1.8,-2.095 1.8,-0.445 2.27,-0.445 2.27,-0.335 2.5,-0.335
  TOP region: -1.651,-0.825 -1.27,-0.825 -1.27,-0.285 -1.651,-0.285
  TOP region: -1.3,-2.205 -1.3,-0.285 1.3,-0.285 1.3,-2.205
  TOP region: -2.5,-0.935 -2.31,-0.935 -2.31,-0.825 -1.61,-0.825 -1.61,1.125 -2.31,1.125 -2.31,0.935 -2.5,0.935
  TOP region: 1.3,2.205 1.3,0.285 -1.09,0.285 -1.09,2.205
  TOP region: 2.5,0.3 1.815,0.3 1.8,0.3 1.8,2.205 2.5,2.205
  TOP region: 1.3,0.285 1.8,0.285 1.8,2.205 1.3,2.205
  silkscreen extent -4.87,-2.7 4.1,2.7, body extent -3.22,-2.7 3.22,2.71, height 1.01
IFX-PG-TDSON-8-57-V#2 [mm] "TDSON 8, 1.27mm pitch; 8 pin, 5.48 mm L X 5.15 mm W X 1 mm H body"
  rect 1.4x0.6 smd paste-0.3 mask+0: 1(-2.97,1.905) 4(-2.97,-1.905)
  rect 1.17x0.6 smd paste-0.3 mask+0: 2(-3.085,0.635) 3(-3.085,-0.635) 5(3.085,-1.905) 6(3.085,-0.635) 7(3.085,0.635) 8(3.085,1.905)
  TOP region: -1.3,-2.205 -1.3,-0.285 1.3,-0.285 1.3,-2.205
  TOP region: 1.3,2.205 1.3,0.285 -1.09,0.285 -1.09,2.205
  TOP region: 2.5,-2.205 2.27,-2.205 2.27,-2.095 1.8,-2.095 1.8,-0.445 2.27,-0.445 2.27,-0.335 2.5,-0.335
  TOP region: 2.5,0.3 1.815,0.3 1.8,0.3 1.8,2.205 2.5,2.205
  TOP region: -2.5,-0.935 -2.31,-0.935 -2.31,-0.825 -1.61,-0.825 -1.61,1.125 -2.31,1.125 -2.31,0.935 -2.5,0.935
  TOP keep-out region: -1.61,-0.285 -1.61,-0.825 -1.3,-0.825 -1.3,-0.285
  TOP keep-out region: 1.3,2.205 1.3,0.285 1.8,0.285 1.8,2.205
  silkscreen extent -4.87,-2.7 4.1,2.7, body extent -3.22,-2.7 3.22,2.71, height 1.01
M20-8891045-Footprint-1 [mm]
  rect 1.02x3.17 smd: 1(-1.778,5.012) 2(0.762,5.012) 3(3.302,5.012) 4(5.842,5.012) 5(8.382,5.012) 6(10.922,5.012) 7(13.462,5.012) 8(16.002,5.012) 9(18.542,5.012) 10(21.082,5.012)
  silkscreen extent -3.05,-5.85 22.35,7.25
MOLX-52207-0960 [mm] "FPC Connector, 9-Leads, Right Angle, Pitch 1.0 mm, Mated Height 2.7 mm, SMT"
  rect 0.6x1.9 smd: 1(-4,1.175) 2(-3,1.175) 3(-2,1.175) 4(-1,1.175) 5(0,1.175) 6(1,1.175) 7(2,1.175) 8(3,1.175) 9(4,1.175)
  rect 2.1x2.8 smd: MP1(-7.15,-1.175) MP2(7.15,-1.175)
  Keep-Out Layer region: -6.1,-0.375 -4.45,-0.375 -4.45,-1.975 -6.1,-1.975
  Keep-Out Layer region: 6.1,-0.375 4.45,-0.375 4.45,-1.975 6.1,-1.975
  silkscreen extent -7.5,-7.07 7.5,2.8, body extent -7.65,-7.07 7.65,1.83, height 2.71
PMEG4010EXEX [mil]
  round 1 smd: 1(-67.44,0)
  rect 45.28x47.24 smd: 2(67.44,0)
  TOP region: -87,-24 -87,24 -48,24 -48,30 13,30 13,-30 -48,-30 -48,-24
  silkscreen extent -106,2 -102,6, body extent -71,-35 74,35, height 35
RCT-0C-Footprint-1 [mm]
  rect 0.8x1.6 smd: 1(0,0)
  body extent -0.64,-1.03 0.64,0.97, height 1.46
RESC1005X40X25ML05T10 [mm] "Chip Resistor, 2-Leads, Body 1.05x0.55mm, IPC Low Density"
  rect 0.7x0.65 smd: 1(-0.475,0) 2(0.475,0)
  body extent -0.53,-0.28 0.53,0.28, height 0.4
SAMTEC_ZF1-15-01-X-WT-XX [mm]
  rect 0.6x1.8 smd: 01(-7,0) 02(-6,0) 03(-5,0) 04(-4,0) 05(-3,0) 06(-2,0) 07(-1,0) 08(0,0) 09(1,0) 10(2,0) 11(3,0) 12(4,0) 13(5,0) 14(6,0) 15(7,0)
  rect 2.2x2.5 smd: S1(-9.6,-2.54) S2(9.6,-2.54)
  silkscreen extent -11.05,-6.69 11.05,0.08, body extent -11.01,-6.83 11.01,0.08, height 3.03
SOD-123 [mil]
  rect 48x30 smd: A(66,0) C(-66,0)
  silkscreen extent -56,-36 56,36
SOT95P237X112-3N [mm]
  rect 1.3x0.59 smd: 1(-1.025,0.95) 2(-1.025,-0.95) 3(1.025,0)
  silkscreen extent -2.39,-1.46 0.65,1.46, body extent -1.54,-1.5 1.29,1.5, height 1.2
SOT-23-5_MC_MCH-L [mil]
  rect 40x18 smd: 1(0,0) 2(0,-37.4) 3(0,-74.8) 4(98,-74.8) 5(98,0)
  silkscreen extent -15,-103 89,31, body extent -14,-98 112,24, height 57
TP [mm] "Test point (40mil Standard)"
  round 1.181 hole 0.8: 1(0,0)
TQFP64_10X10_STM-M [mil]
  rect 61x11 smd paste+0 mask+0: 1(-227.5,147.64) 2(-227.5,127.95) 3(-227.5,108.27) 4(-227.5,88.58) 5(-227.5,68.9) 6(-227.5,49.21) 7(-227.5,29.53) 8(-227.5,9.84) 9(-227.5,-9.84) 10(-227.5,-29.53) 11(-227.5,-49.21) 12(-227.5,-68.9) 13(-227.5,-88.58) 14(-227.5,-108.27) 15(-227.5,-127.95) 16(-227.5,-147.64) 33(227.5,-147.64) 34(227.5,-127.95) 35(227.5,-108.27) 36(227.5,-88.58) 37(227.5,-68.9) 38(227.5,-49.21) 39(227.5,-29.53) 40(227.5,-9.84) 41(227.5,9.84) 42(227.5,29.53) 43(227.5,49.21) 44(227.5,68.9) 45(227.5,88.58) 46(227.5,108.27) 47(227.5,127.95) 48(227.5,147.64)
  rect 11x61 smd paste+0 mask+0: 17(-147.64,-227.5) 18(-127.95,-227.5) 19(-108.27,-227.5) 20(-88.58,-227.5) 21(-68.9,-227.5) 22(-49.21,-227.5) 23(-29.53,-227.5) 24(-9.84,-227.5) 25(9.84,-227.5) 26(29.53,-227.5) 27(49.21,-227.5) 28(68.9,-227.5) 29(88.58,-227.5) 30(108.27,-227.5) 31(127.95,-227.5) 32(147.64,-227.5) 49(147.64,227.5) 50(127.95,227.5) 51(108.27,227.5) 52(88.58,227.5) 53(68.9,227.5) 54(49.21,227.5) 55(29.53,227.5) 56(9.84,227.5) 57(-9.84,227.5) 58(-29.53,227.5) 59(-49.21,227.5) 60(-68.9,227.5) 61(-88.58,227.5) 62(-108.27,227.5) 63(-127.95,227.5) 64(-147.64,227.5)
  rect 238x238 smd paste-118.5 mask+0: EPAD(0,0)
  silkscreen extent -278,-278 278,278, body extent -236,-236 236,236, height 47
XTAL_ABM3B-8.000MHZ-10-1-U-T [mm]
  rect 1.2x1.8 smd: 1(-1.2,2) 2(-1.2,-2) 3(1.2,-2) 4(1.2,2)
  silkscreen extent -2.65,-2.5 1.6,2.5, body extent -1.59,-2.5 1.59,2.5, height 1.1

## Part data
BOOTA BOOTB BOOTC C_FB HGA HGB HGC HVGA HVGB HVGC LGA LGB LGC LVGA LVGB LVGC OUT1A OUT1B OUT1C S_N S_P SENSE1A SENSE1B SENSE1C TP1 TP2 TP3 TP4 TP5 TP6 TP7 TP8 TP9 TP10A TP10B TP10C TP11 TP12: library part CMP-024-000003-4, "Metal Foil, 0W, 0.05ohm, Surface Mount, 0805", Manufacturer Part Number 1=RCT-0C
C1 C2 C3 C4 C5: library part "CAP 100nF 50V", "Default Symbol for Capacitors", Manufacturer Part Number 1=CC0603KPX7R9BB104, Manufacturer Part Number 2=0805J0500104KJT, Rating=50V, Supplier Part Number 1=311-3567-1-ND, Temperature Coefficient=X7R, Tolerance=10%, Part Number="CAP 100nF 50V", Supplier 1=Digi-Key, Supplier 2=Digi-Key, Supplier Part Number 2=1608-1458-1-ND
C6: library part "CAP 2200pF 50V", "Default Symbol for Capacitors", Manufacturer Part Number 1=06035C222KAT2A, Manufacturer Part Number 2=CL21B222KBANNNC, Rating=50V, Supplier Part Number 1=478-1219-1-ND, Temperature Coefficient=X7R, Tolerance=10%, Part Number="CAP 2200pF 50V", Supplier 1=Digi-Key, Supplier 2=Digi-Key, Supplier Part Number 2=1276-1171-1-ND
C7 C8 C9: library part "CAP 50pF 50V", "50 pF ±5% 50V Ceramic Capacitor C0G, NP0 0603 (1608 Metric)", Operating Temperature="-55°C ~ 125°C", Package=0805, Rating=50V, Supplier Part Number 1=13-CC0603JRNPO9BN500CT-ND, Temperature Coefficient=X7R, Tolerance=10%, Supplier 1=Digikey
C10 C18: library part "CAP 22pF 50V", "Default Symbol for Capacitors", Rating=50V, Temperature Coefficient=X7R, Tolerance=10%, Part Number="CAP 22pF 50V"
C11: library part "CAP 10uF 16V", "CAP CER 10UF 16V X5R 0603/0805", Operating Temperature="-55°C ~ 85°C", Package=0603/0805, Rating=16V, Temperature Coefficient=X5R, Tolerance=10%, Part Number="CAP 10uF 16V"
C12: library part "CAP 0.10uF 16V", "CAP CER 0.10UF 16V X5R 0603", Operating Temperature="-55°C ~ 85°C", Package=0603/0805, Rating=16V, Temperature Coefficient=X5R, Tolerance=10%, Part Number="CAP 0.10uF 16V"
C13 C14: library part "CAP 10pF 50V", "Default Symbol for Capacitors", Rating=50V, Temperature Coefficient=X7R, Tolerance=10%, Part Number="CAP 10pF 50V"
C15: library part "CAP 330pF 50V", "Default Symbol for Capacitors", Rating=50V, Temperature Coefficient=X7R, Tolerance=10%, Part Number="CAP 330pF 50V"
C16: library part "CAP 220pF 16V", "Default Symbol for Capacitors", Rating=16V, Temperature Coefficient=X5R, Tolerance=10%, Part Number="CAP 220pF 16V"
C17 C21 C22: library part CMP-001-00129-1, Manufacturer Part Number 1=GRM21BR61H106KE43L, Manufacturer Part Number 2=CL32B106KBJNNWE, Rating=50V, Temperature Coefficient=X5R, Tolerance=10%, Part Number="CAP 10uF 50V"
C19: library part "CAP 1nF 50V", "CAP CER 0603 1NF 50V X7R 10%", Operating Temperature="-55°C ~ 125°C", Package=0805, Rating=50V, Supplier Part Number 1=80-C0603X102K5R3316, Temperature Coefficient=X7R, Tolerance=10%, Supplier 1=Mouser
C20: library part "CAP 0.047uF 16V", "Default Symbol for Capacitors", Rating=16V, Temperature Coefficient=X5R, Tolerance=10%, Part Number="CAP 0.047uF 16V"
C23 C24 C25: library part "CAP 10uF 50V", "Default Symbol for Capacitors", Manufacturer Part Number 1=GRM21BR61H106KE43L, Manufacturer Part Number 2=CL32B106KBJNNWE, Rating=50V, Supplier Part Number 1=490-18663-1-ND, Temperature Coefficient=X5R, Tolerance=10%, Part Number="CAP 10uF 50V", Supplier 1=Digi-Key, Supplier 2=Digi-Key, Supplier Part Number 2=1276-3388-1-ND
C29 C30 C31 C32 C33 C34 C35 C36 C37 C38 C39 C40 C41 C42 C43 C44: library part CMP-001-00223-1, "Ceramic Capacitor, Multilayer, Ceramic, 50V, 10% +Tol, 10% -Tol, X7R, 15% TC, 10uF, Surface Mount, 1206", Capacitor Type=Ceramic, Case/Package=1206, Max Operating Temperature=125°C, Min Operating Temperature=-55°C, Mounting Technology="Surface Mount", Pins=2, RoHS Compliant=Yes
C45A C45B C45C C48A C48B C48C C50A C50B C50C C51A C51B C51C: library part CMP-001-00218-3, "Template for 0603 ceramic capacitor", Capacitor Type=Ceramic, Case/Package=0603, Mounting Technology=SM, Pins=2
C46A C46B C46C C47A C47B C47C C49A C49B C49C: library part CMP-001-00222-1, "Ceramic Capacitor, Multilayer, Ceramic, 50V, 10% +Tol, 10% -Tol, X7R, 15% TC, 0.22uF, Surface Mount, 0603", Capacitor Type=Ceramic, Case/Package=0603, Max Operating Temperature=125°C, Min Operating Temperature=-55°C, Mounting Technology="Surface Mount", Pins=2, RoHS Compliant=Yes
D1 D6: library part "LED GREEN SMD 0603", "Green 570nm LED Indication - Discrete 2V 0603 (1608 Metric)", Supplier Part Number 1=732-4980-1-ND, Supplier 1=Digikey
D2: library part "LED RED SMD 0603", "Red 625nm LED Indication - Discrete 2V 0603 (1608 Metric)", Supplier Part Number 1=732-4978-1-ND, Supplier 1=Digikey
D3: library part "LED BLUE SMD 0603", "Blue 470nm LED Indication - Discrete 3.2V 0603 (1608 Metric)", Supplier Part Number 1=732-4966-1-ND, Supplier 1=Digikey
D5: library part "DIODE SCHOTTKY 20V 1A", "Diode Schottky 20V 1A Surface Mount SOD-123FL", Current Rating=1A, Package=SOD-123, Voltage Rating=20V, ComponentLink1Description=digikey, ComponentLink1URL=https://www.digikey.ca/product-detail/en/on-semiconductor/MBR0540T1G/MBR0540T1GOSCT-ND/917967, Digikey=SM5817PL-TPMSCT-ND, Digikey Link=https://www.digikey.ca/product-detail/en/micro-commercial-co/SM5817PL-TP/SM5817PL-TPMSCT-ND/1793410, MF="Micro Commercial Co", MP=SM5817PL-TP, Part Number="DIODE SCHOTTKY 20V 1A", Pin Count=2, Supplier URL 1=https://www.digikey.ca/product-detail/en/on-semiconductor/MBR0540T1G/MBR0540T1GOSCT-ND/917967
D9A D9B D9C: library part CMP-004-00061-3, "PMEG4010EXE-Q - 40 V", Manufacturer_Name=Nexperia, Datasheet Link=https://assets.nexperia.com/documents/data-sheet/PMEG4010EXE.pdf, Design Item ID=PMEG4010EXEX, Height=1mm, Manufacturer_Part_Number=PMEG4010EXEX, Source=SamacSys.SchLib
J1: library part CMP-002-00632-1, "Board Connector, 10 Contact(s), 1 Row(s), Male, Right Angle, 0.1 inch Pitch, Surface Mount Terminal, Locking", Contact Resistance=20mR, Insulation Resistance=1GR, Max Operating Temperature=105°C, Min Operating Temperature=-40°C, Rated Current (Signal)=3A, Body Breadth=0.098inch, Body Depth=0.217inch, Body Length=0.9inch, Connector Type="BOARD CONNECTOR", Contact Finish - Mating="NOT SPECIFIED", Contact Gender=Male, Contact Pattern=RECTANGULAR, Contact Style="SQ PIN-SKT", Durability=300Cycles, Insulation Material=Glass, Mating Contact Pitch=0.1inch, Mounting Option 1=LOCKING, Mounting Style="RIGHT ANGLE", Mounting Technology=Board, Number of Contacts=10, Number Of PCB Rows=1, Number of Rows Loaded=1, PCB Contact Pattern=RECTANGULAR, Reach SVHC Compliant=Yes, Reference Standard=UL, Reliability=COMMERCIAL, RoHS Compliant=Yes, Terminal Pitch=2.54mm, Termination=SMD/SMT
J4: library part CMP-002-00627-2, "15 Position FFC Connector Contacts, Bottom 0.039 (1.00mm) Surface Mount, Right Angle", Case/Package=None, Availability=Warning, Check_prices=https://www.snapeda.com/parts/ZF1-15-01-T-WT-TR/Samtec/view-part/3472733/?ref=eda, Component Type=Standard, Design Item ID=ZF1-15-01-X-WT-XX, MF=Samtec, MP=ZF1-15-01-T-WT-TR, Pins=15, Price=None, Purchase-URL=https://pricing.snapeda.com/search/part/ZF1-15-01-T-WT-TR/?ref=eda, SnapEDA_Link=https://www.snapeda.com/parts/ZF1-15-01-T-WT-TR/Samtec/view-part/3472733/?ref=snap, Source=ZF1-15-01-X-WT-XX.SchLib
J6: library part CMP-1241-00181-1, "1.0 mm Pitch Easy-On(TM) Type FPC Connector, 2.7 mm Mated Height, Right Angle, ZIF, SMT, Top Contact, 9 Circuits, -30 to 85 degC, ELV and RoHS Compliant, Tape and Reel", Current (Max per Contact)=1A, Manufacturer=Molex, Voltage (Max)=125V, Circuits (Loaded)=9, ComponentLink1Description="Manufacturer URL", ComponentLink1URL=http://www.molex.com/molex/index.jsp, ComponentLink2Description=Datasheet, ComponentLink2URL=http://www.molex.com/webdocs/datasheets/pdf/en-us/0522070960_FFC_FPC_CONNECTORS.pdf, ComponentLink3Description="Package Specification", ComponentLink3URL=http://www.molex.com/pdm_docs/sd/522070960_sd.pdf, Contact Position=Top, Durability (mating cycles max)=30, Entry Angle="90degrees Angle", Mated Height=2.70mm, Material - Metal="Phosphor Bronze", Material - Plating Mating=Gold, Material - Plating Termination=Tin, Mounting Technology="Surface Mount", Number of Rows=1, Orientation="Right Angle", PackageDescription="9-Lead FPC Connector, Pitch 1.0 mm", PackageReference=52207-0960, PackageVersion="Rev. F, 03/2007", Packing="Tape and Reel", PartNumber=52207-0960, PCB Locator=No, PCB Retention=Yes, Pitch - Mating Interface=1.00mm, Pitch - Termination Interface=1.00mm, Polarized to PCB=Yes, RoHS=TRUE, Stackable=No
J?: library part CMP-002-00633-1, "Connector, Ffc, 24Pos, 1 Row, 1Mm Rohs Compliant: Yes"
Q1A Q1B Q1C: "MOSFET 2N-CH 40V 45A 8TDSON", Manufacturer="Infineon Technologies", Manufacturer Order Number=IAUC45N04S6N070H, PackageReference=PG-TDSON-8-57
Q2: library part "MOSFET N-CH TN2130K1-G", "N-Channel 300 V 85mA (Tj) 360mW (Tc) Surface Mount TO-236AB (SOT23)", Mfr_Name=Microchip, Supplier Part Number 1=TN2130K1-GCT-ND, Copyright="Copyright (C) 2021 Ultra Librarian. All rights reserved.", Digi-Key_Part_Number_1=TN2130K1-GCT-ND, Digi-Key_Part_Number_2=TN2130K1-GDKR-ND, Digi-Key_Part_Number_3=TN2130K1-GTR-ND, Manufacturer Part Number 1=TN2130K1-G, Manufacturer_Part_Number=TN2130K1-G, Part Number="MOSFET N-CH TN2130K1-G", RefDes=RefDes, Supplier 1=Digi-Key, Supplier URL 1=https://www.digikey.com/en/products/detail/microchip-technology/TN2130K1-G/4902939, Type=DEV
R1 R2 R3 R28A R28B R28C R35A R35B R35C: library part CMP-009-00391-3, "Template for 0603 Resistor", Case/Package=0603, Pins=2
R4 R5 R6: library part "RES 1.8k 1/8W", "Default Resistor Symbol", Package=0805, Power (Watts)=0.125W, Tolerance=5%, Part Number="RES 1.8k 1/8W"
R7 R12 R22: library part "RES 5.83k 1/10W 0.1%", "RES 5.83K OHM 0.1% 1/10W 0603", Package=0603, Power (Watts)=0.125W, Supplier Part Number 1=2019-RN73H1JTTD5831B25CT-ND, Tolerance=1%, Supplier 1=Digikey
R11 R32: library part "RES 110.0 1/8W - 1%", "Default Resistor Symbol", Manufacturer Part Number 1=RMCF0603FT110R, Package=0805, Power (Watts)=0.125W, Supplier Part Number 1=RMCF0603FT110RCT-ND, Tolerance=1%, Part Number="RES 110.0 1/8W - 1%", Supplier 1=Digi-Key, Supplier URL 1=https://www.digikey.ca/en/products/detail/stackpole-electronics-inc/RMCF0603FT110R/1761268
R13: library part "RES 845 1/10W 1%", "RES 845 OHM 1% 1/10W 0603", Package=0603, Power (Watts)=0.125W, Supplier Part Number 1=7098270, Tolerance=1%, Supplier 1="Future Electronics"
R14 R15 R17 R18 R19: library part "RES 100R 1/10W 0.05%", "RES SMD 100 OHM 0.05% 1/10W 0603", Package=0603, Power (Watts)=0.125W, Supplier Part Number 1=RG16N100WCT-ND, Tolerance=1%, Supplier 1=Digikey
R16: library part "RES 1.87K 1/10W 1%", "RES 1.87K OHM 1% 1/10W 0603", Package=0603, Power (Watts)=0.125W, Supplier Part Number 1=2610988, Tolerance=1%, Supplier 1="Future Electronics"